# Altium PCB PCB3.PcbDoc (part 1 of 2)
Units mm, origin at the board's own origin, x right, y up, seen from the top; angles counter-clockwise.
Board outline 95 x 84.16 mm, 2 copper layers (Top Layer, Bottom Layer); 165 components, 99 nets, 457 pads, 1500 vias.
Unrouted connection lines stored in the file: 1.
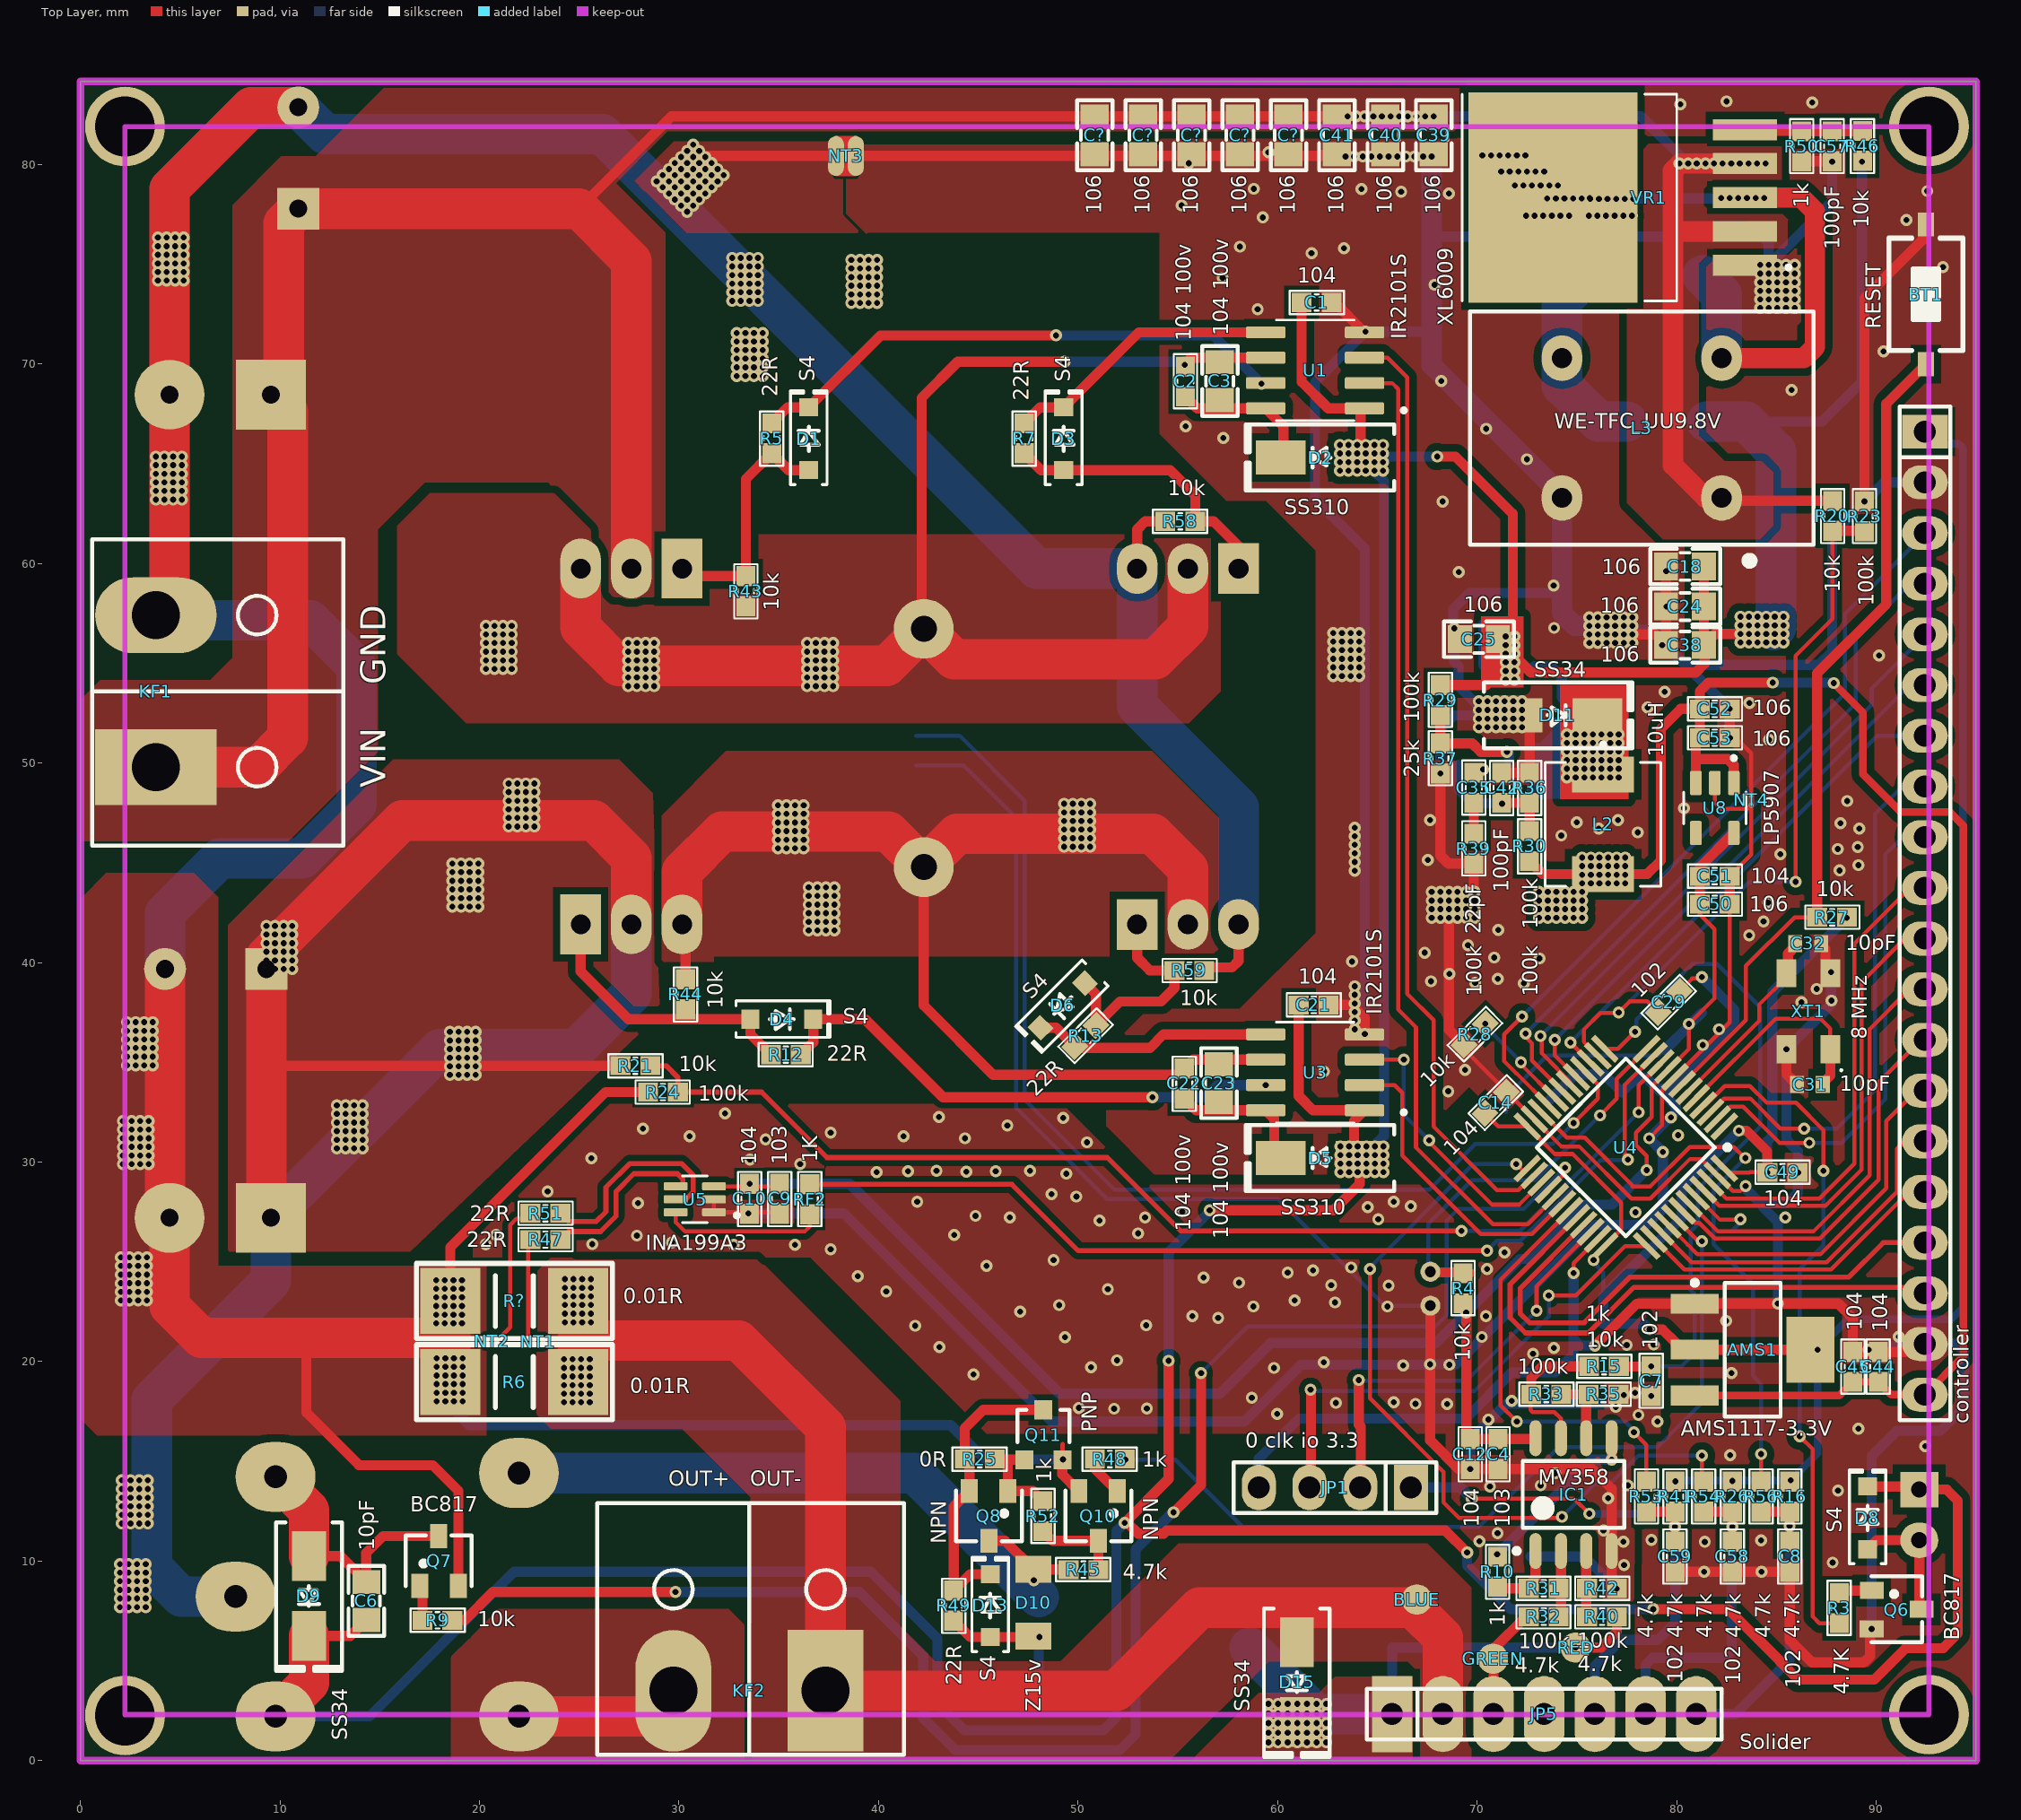
[diagram p0: Top Layer view]
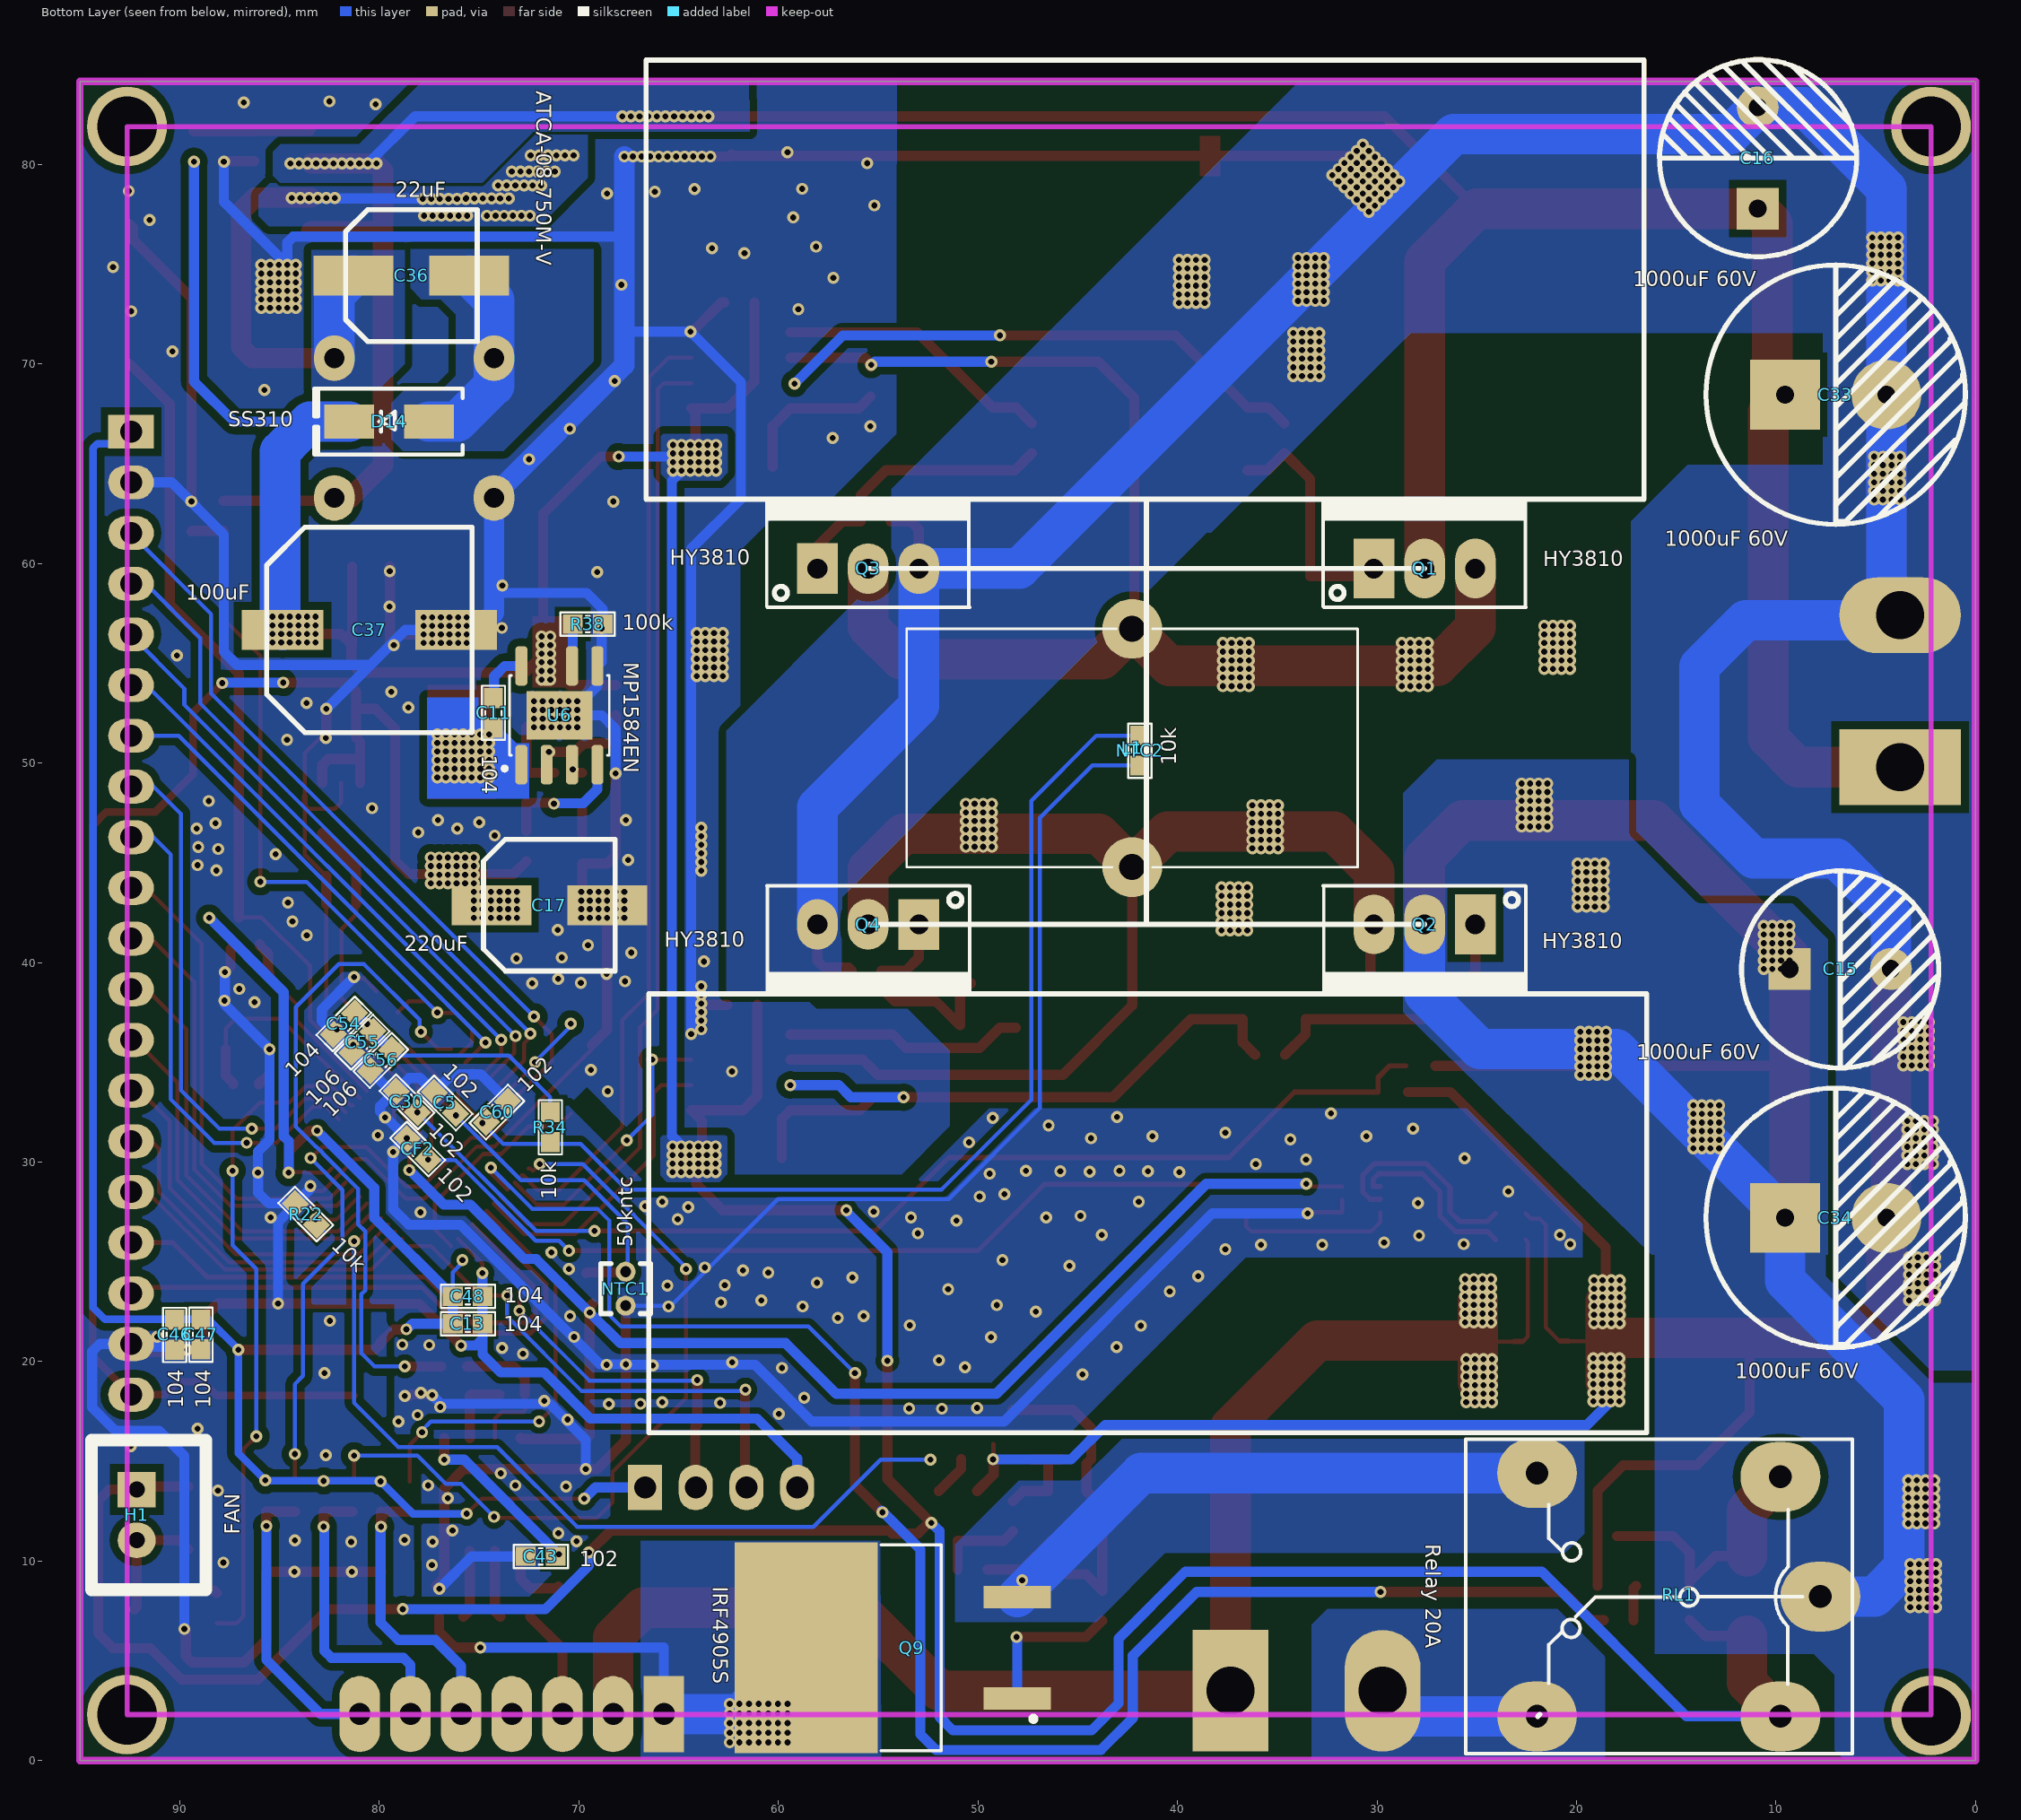
[diagram p1: Bottom Layer view, seen from below]
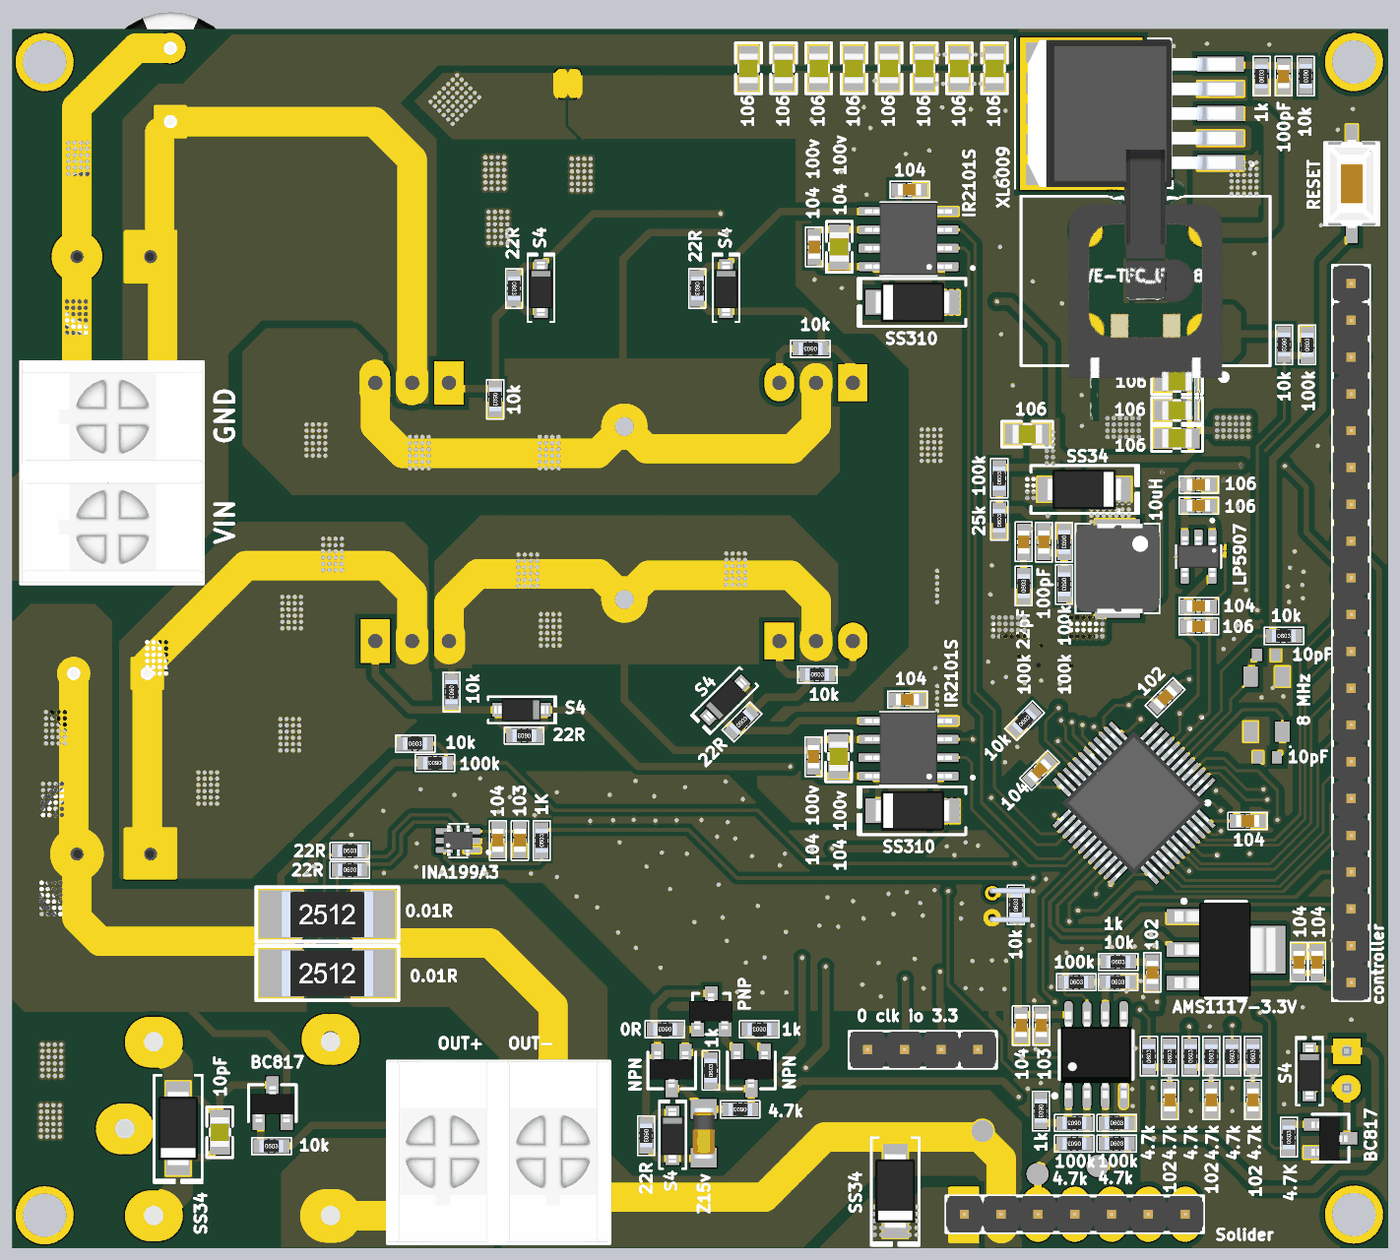
[diagram p3: 3D render of the assembled board from above, using the file's embedded part models]
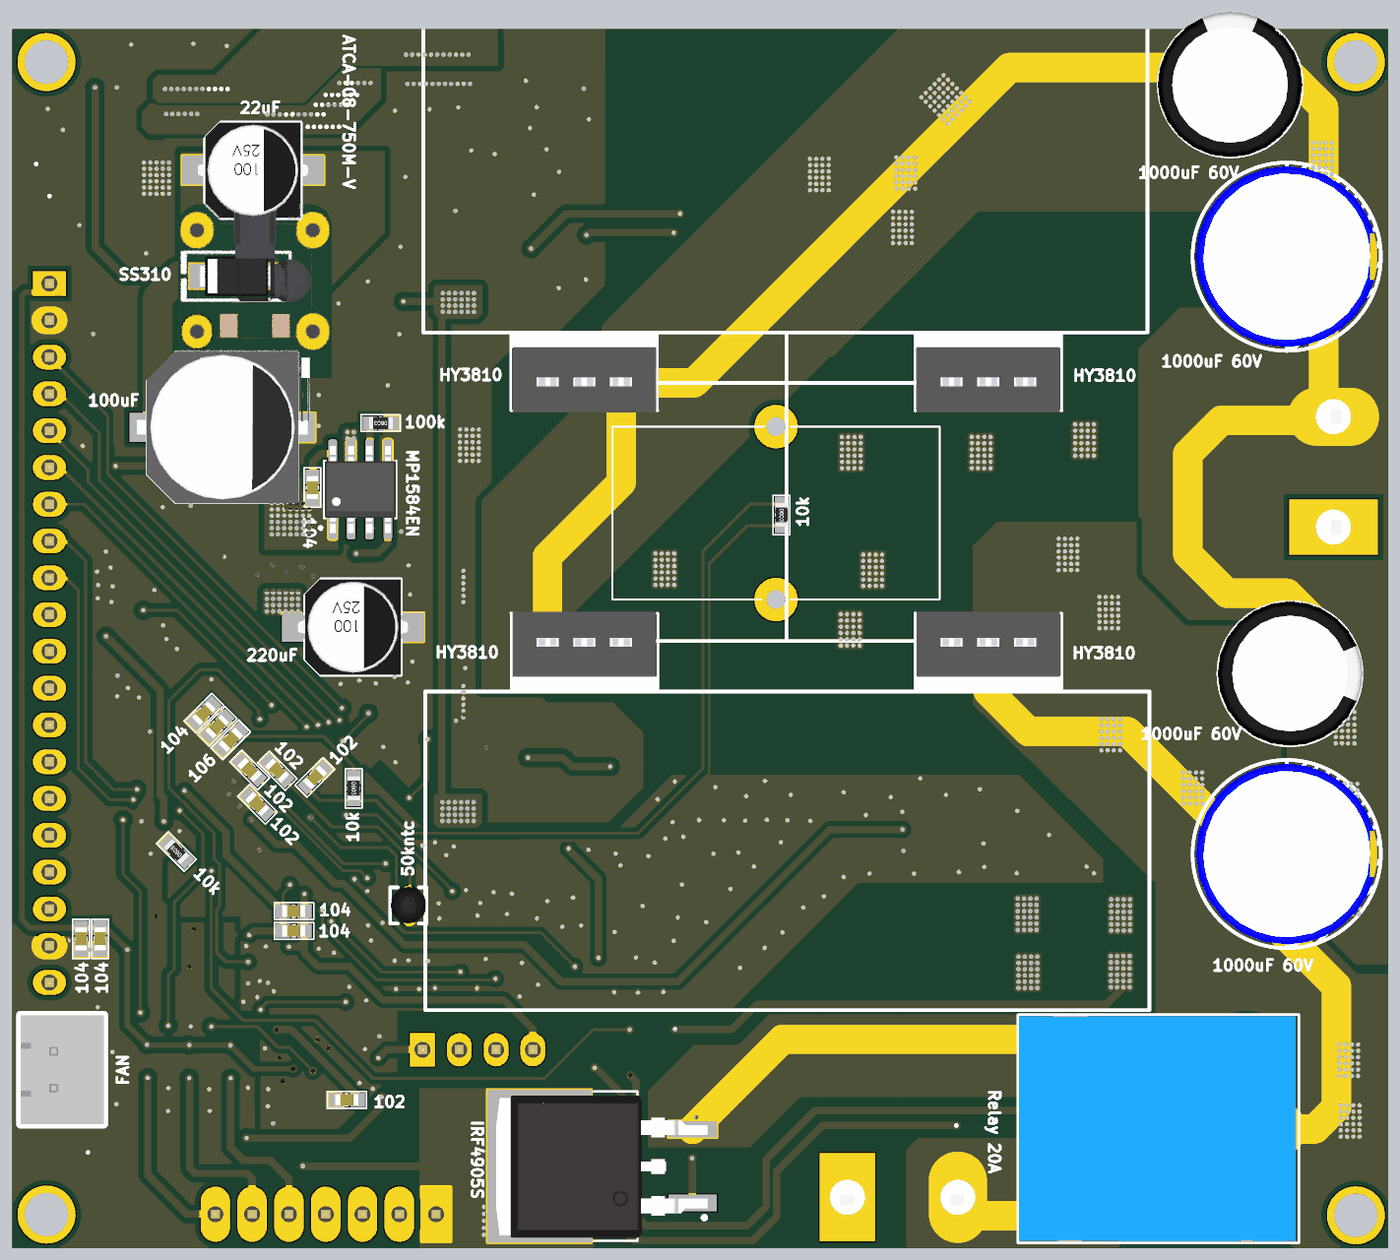
[diagram p4: 3D render of the assembled board from below, using the file's embedded part models]

## Layer stack, top to bottom
Top Solder: solder mask 0.0102, Solder Resist, Dk 3.5
Top Layer: signal copper 0.0356
Dielectric 1: dielectric 0.32, FR-4, Dk 4.8
Bottom Layer: signal copper 0.0356
Bottom Solder: solder mask 0.0102, Solder Resist, Dk 3.5

## Board outline
0,0 0,84.162 95,84.162 95,0

## Design rules (kind name [scope] priority, off if disabled: settings)
Clearance [All] p1: gap=0.203 ignorepadtopadclearanceinfootprint=FALSE
DiffPairsRouting [All] p1: maxlimit=0.254 minlimit=0.203 mostfreqgap=0.254 toplayer_minwidth=0.203 toplayer_maxwidth=0.33 toplayer_prefwidth=0.254 bottomlayer_minwidth=0.203 bottomlayer_maxwidth=0.33 bottomlayer_prefwidth=0.254 maxuncoupledlength=12.7
PolygonConnect [All] p1: connectstyle=Direct reliefconductorwidth=0.254 reliefentries=4 polygonreliefangle="90 Angle" airgapwidth=0.254
RoutingVias [All] p1: holewidth=0.3 width=0.6 viastyle="Through Hole" minholewidth=0.3 minwidth=0.6 maxholewidth=0.3 maxwidth=0.6
SolderMaskExpansion [All] p1: expansion=0.102 istentingtop=FALSE
Width [All] p1: maxlimit=1.016 minlimit=0.203 preferedwidth=0.508
29 further rules are at their usual default settings.

## Classes and differential pairs
differential pair SO: +SO_P -SO_N
differential pair USB: +USB_P -USB_N

## Components (designator, comment, footprint, x,y, rotation, side; value= is the part's Value field where it differs from the comment)
AMS1 "AMS1117-3.3V" SOT223 83.8,20.599 r270 top value="AMS1117-3.3V SOT223"
BLUE "TestPoin" TP-60 66.979,8.074 r90 top
BT1 "RESET" "Nut Nhan 2 Chan SMD 3x6x2.5" 92.481,73.482 r90 top
C1 "104" "tu 0603" 61.951,73.076 r0 top
C2 "104 100v" "tu 0603" 55.372,69.113 r90 top
C3 "104 100v" "tu 0805" 57.099,69.139 r270 top
C4 "103" "tu 0603" 71.044,15.367 r270 top
C5 "102" "tu 0603" 76.708,32.969 r225 bottom
C6 "10pF" "tu 0805" 14.326,8.001 r90 top
C7 "102" "tu 0603" 78.715,19.025 r90 top
C8 "102" "tu 0603" 85.659,10.223 r90 top
C9 "103" "tu 0603" 35.044,28.157 r270 top
C10 "104" "tu 0603" 33.536,28.157 r270 top
C11 "104" "tu 0603" 74.273,52.501 r90 bottom
C12 "104" "tu 0603" 69.647,15.367 r270 top
C13 "104" "tu 0603" 75.565,21.895 r180 bottom
C14 "104" "tu 0603" 70.92,32.972 r45 top
C15 "1000uF 60V" "tu hoa 10mm" 6.782,39.675 r180 bottom
C16 "1000uF 60V" "tu hoa 10mm" 10.922,80.315 r90 bottom
C17 "220uF" "tu nhom 6.3 (d)" 71.476,42.875 r180 bottom
C18 "106" "tu 0805" 80.416,59.842 r180 top
C21 "104" "tu 0603" 61.798,37.871 r0 top
C22 "104 100v" "tu 0603" 55.321,33.934 r270 top
C23 "104 100v" "tu 0805" 57.052,33.954 r270 top
C24 "106" "tu 0805" 80.416,57.836 r180 top
C25 "106" "tu 0805" 70.082,56.196 r180 top
C29 "102" "tu 0603" 79.601,38.021 r225 top
C30 "102" "tu 0603" 78.616,33.023 r225 bottom
C31 "10pF" CAPC1608X09L 86.665,33.884 r0 top
C32 "10pF" CAPC1608X09L 86.589,40.945 r180 top
C33 "1000uF 60V" "tu hoa 13mm" 7.01,68.453 r180 bottom
C34 "1000uF 60V" "tu hoa 13mm" 7.01,27.203 r180 bottom
C35 "22pF" "tu 0603" 69.828,48.753 r90 top
C36 "22uF" "tu nhom 6.3 (D)" 78.384,74.422 r180 bottom
C37 "100uF" "tu nhom 10 (g)" 80.493,56.667 r180 bottom
C38 "106" "tu 0805" 80.416,55.905 r180 top
C39 "106" "tu 0805" 67.818,81.458 r270 top
C40 "106" "tu 0805" 65.391,81.458 r270 top
C41 "106" "tu 0805" 62.964,81.458 r270 top
C42 "100pF" "tu 0603" 71.225,48.753 r270 top
C43 "102" "tu 0603" 71.907,10.236 r180 bottom
C44 "104" "tu 0603" 90.094,19.736 r90 top
C45 "104" "tu 0603" 88.824,19.736 r90 top
C46 "104" "tu 0603" 90.247,21.347 r270 bottom
C47 "104" "tu 0603" 88.935,21.361 r270 bottom
C48 "104" "tu 0603" 75.565,23.266 r180 bottom
C49 "104" "tu 0603" 85.293,29.489 r0 top
C50 "106" "tu 0603" 81.902,42.926 r0 top
C51 "104" "tu 0603" 81.902,44.323 r0 top
C52 "106" "tu 0603" 81.902,52.705 r0 top
C53 "106" "tu 0603" 81.902,51.257 r0 top
C54 "104" "tu 0603" 81.763,36.932 r315 bottom
C55 "106" "tu 0603" 80.848,36.017 r315 bottom
C56 "106" "tu 0603" 79.908,35.103 r315 bottom
C57 "100pF" "tu 0603" 87.782,80.899 r90 top
C58 "102" "tu 0603" 82.786,10.223 r90 top
C59 "102" "tu 0603" 79.912,10.223 r90 top
C60 "102" "tu 0603" 74.092,32.512 r315 bottom
C? "106" "tu 0805" 60.537,81.458 r270 top
C? "106" "tu 0805" 58.11,81.458 r270 top
C? "106" "tu 0805" 50.829,81.458 r270 top
C? "106" "tu 0805" 55.683,81.458 r270 top
C? "106" "tu 0805" 53.256,81.458 r270 top
CF2 "102" "tu 0603" 78.08,30.658 r225 bottom
controller "JP 1x20 2.54" "JP 1x20 DT" 92.431,66.599 r270 top (schematic designator JP2)
D1 "S4" "DIODE SOD-123" 36.5,66.243 r90 top
D2 "SS310" "DIODE SMA" 62.154,65.303 r180 top
D3 "S4" "DIODE SOD-123" 49.276,66.243 r90 top
D4 "S4" "DIODE SOD-123" 35.154,37.16 r0 top
D5 "SS310" "DIODE SMA" 62.154,30.201 r180 top
D6 "S4" "DIODE SOD-123" 49.225,37.846 r225 top
D8 "S4" "DIODE SOD-123" 89.56,12.167 r90 top
D9 "SS34" "DIODE SMA" 11.455,8.255 r270 top
D10 "Z15v" "DIODE ZENNER SMD SOD80" 47.752,7.925 r270 top
D11 "SS34" "DIODE SMA" 74.019,52.386 r0 top
D13 "S4" "DIODE SOD-123" 45.593,7.772 r90 top
D14 "SS310" "DIODE SMA" 79.502,67.107 r0 bottom
D15 "SS34" "DIODE SMA" 60.96,3.937 r270 top
GREEN "TestPoin" TP-60 70.79,5.105 r90 top
H1 "FAN" XH2.54M-2 92.151,13.589 r270 bottom
IC1 "MV358" "SOP 8" 74.828,13.335 r90 top
JP1 "0 clk io 3.3" "JP 1x4 DT" 66.675,13.691 r180 top
JP5 "Solider" "JP 1x7 DT" 65.735,2.337 r0 top
KF1 "VIN    GND" "CON 2 KF7.62" 3.785,49.835 r90 top
KF2 "OUT+   OUT-" "CON 2 KF7.62" 37.287,3.505 r180 top
L1 "ATCA-08-750M-V" IND_ATCA-08-750M-V 42.266,50.749 r270 bottom locked
L2 "10uH" "CUON CAM SMD 0530" 76.305,46.925 r270 top
L3 "WE-TFC_UU9.8V" WE-TFC_UU9.8V 78.244,66.782 r180 top locked
NT1 "0.25mm" NetTie_0.25mm 23.186,21.004 r180 top net-tie
NT2 "0.25mm" NetTie_0.25mm 20.357,21.029 r0 top net-tie
NT3 "NetTie_2mm" NetTie_2mm 37.862,80.416 r0 top net-tie
NT4 "0.25mm" NetTie_0.25mm 83.73,48.387 r270 top net-tie
NTC1 "50kntc" MF52 67.691,23.673 r90 bottom locked
NTC2 "10k" "tro smd 0603" 41.885,50.622 r270 bottom
Q1 "HY3810" TO220#1 30.15,59.741 r180 bottom locked
Q2 "HY3810" TO220#1 25.07,41.91 r0 bottom locked
Q3 "HY3810" TO220#2 58.039,59.741 r180 bottom
Q4 "HY3810" TO220#2 52.959,41.91 r0 bottom
Q6 "BC817" SOT-23 91.014,7.589 r270 top value=C9014
Q7 "BC817" SOT-23 17.958,10.008 r0 top value=C9014
Q8 "NPN" SOT-23 45.537,12.263 r180 top value=C9014
Q9 "IRF4905S" D2PACK 54.153,6.198 r0 bottom
Q10 "NPN" SOT-23 51.023,12.263 r180 top value=C9014
Q11 "PNP" SOT23 48.26,16.332 r0 top
R3 "4.7K" "Tro smd 0603" 88.138,7.645 r90 top
R4 "10k" "tro smd 0603" 69.291,23.673 r90 top
R5 "22R" "Tro smd 0603" 34.646,66.269 r270 top
R6 "0.01R" "tro smd 2512" 21.742,18.974 r0 top
R7 "22R" "Tro smd 0603" 47.295,66.269 r270 top
R9 "10k" "Tro smd 0603" 17.894,7.036 r0 top
R10 "1k" "Tro smd 0603" 71.018,9.474 r270 top
R12 "22R" "Tro smd 0603" 35.357,35.382 r180 top
R13 "22R" "Tro smd 0603" 50.368,36.322 r45 top
R15 "1k" "Tro smd 0603" 76.352,19.761 r0 top
R16 "4.7k" "Tro smd 0603" 85.659,13.233 r90 top
R20 "10k" "tro smd 0603" 87.808,62.382 r270 top
R21 "10k" "tro smd 0603" 27.813,34.823 r0 top
R22 "10k" "Tro smd 0603" 83.668,27.381 r45 bottom
R23 "100k" "tro smd 0603" 89.408,62.357 r90 top
R24 "100k" "tro smd 0603" 29.198,33.503 r180 top
R25 "0R" "Tro smd 0603" 45.072,15.113 r180 top
R26 "4.7k" "Tro smd 0603" 82.786,13.233 r90 top
R27 "10k" "Tro smd 0603" 87.782,42.266 r0 top
R28 "10k" "Tro smd 0603" 69.875,36.398 r45 top
R29 "100k" "Tro smd 0603" 68.151,53.148 r90 top
R30 "100k" "Tro smd 0603" 72.622,45.832 r270 top
R31 "100k" "Tro smd 0603" 73.33,8.636 r180 top
R32 "4.7k" "Tro smd 0603" 73.33,7.214 r180 top
R33 "100k" "Tro smd 0603" 73.457,18.364 r0 top
R34 "10k" "Tro smd 0603" 71.425,31.75 r270 bottom
R35 "10k" "Tro smd 0603" 76.327,18.364 r0 top
R36 "100k" "Tro smd 0603" 72.622,48.753 r270 top
R37 "25k" "Tro smd 0603" 68.151,50.227 r90 top
R38 "100k" "Tro smd 0603" 69.548,56.958 r0 bottom
R39 "100k" "Tro smd 0603" 69.828,45.705 r90 top
R40 "4.7k" "Tro smd 0603" 76.251,7.214 r0 top
R41 "4.7k" "Tro smd 0603" 79.912,13.233 r90 top
R42 "100k" "Tro smd 0603" 76.251,8.636 r0 top
R43 "10k" "tro smd 0603" 33.35,58.61 r270 top
R44 "10k" "tro smd 0603" 30.328,38.405 r270 top
R45 "4.7k" "tro smd 0603" 50.267,9.576 r180 top
R46 "10k" "tro smd 0603" 89.306,80.924 r270 top
R47 "22R" "tro smd 0603" 23.305,26.111 r0 top
R48 "1k" "tro smd 0603" 51.587,15.113 r180 top
R49 "22R" "tro smd 0603" 43.764,7.772 r270 top
R50 "1k" "tro smd 0603" 86.258,80.899 r90 top
R51 "22R" "tro smd 0603" 23.305,27.432 r0 top
R52 "1k" "tro smd 0603" 48.235,12.255 r90 top
R53 "4.7k" "tro smd 0603" 78.476,13.233 r90 top
R54 "4.7k" "tro smd 0603" 81.349,13.233 r90 top
R56 "4.7k" "Tro smd 0603" 84.222,13.233 r90 top
R58 "10k" "tro smd 0603" 55.118,62.103 r180 top
R59 "10k" "tro smd 0603" 55.575,39.599 r0 top
R? "0.01R" "tro smd 2512" 21.742,23.038 r0 top
RED "TestPoin" TP-60 74.93,5.664 r90 top
RF2 "1K" "Tro smd 0603" 36.551,28.131 r90 top
RL1 "Relay 20A" "Relay 5 Chan SRD" 7.779,8.224 r0 bottom
U1 "IR2101S" SOIC127P600X175-8N 61.874,69.672 r180 top
U3 "IR2101S" SOIC127P600X175-8N 61.874,34.493 r180 top
U4 "STM32F103C8T6" LQFP-48_19.6_393_58X11_SMD 77.445,30.734 r225 top locked
U5 "INA199A3" SOT65P210X110-6N 30.793,28.131 r180 top
U6 "MP1584EN" SOIC127P600X170-9N 70.971,52.386 r90 bottom
U8 "LP5907" SOT95P280X145-5N 81.905,47.742 r270 top
VR1 "XL6009" DPAK170P1435X465-6N 77.292,78.334 r180 top
XT1 "8 MHz" DFN220P320X110-4N 86.594,37.554 r90 top

## Footprints (in the part's own frame and the unit in brackets; to place one, negate y for a bottom-side part, rotate by r counter-clockwise, add the part's x,y. Pads: shape width x height; smd on the part's side, far side on the other; paste and mask are expansions set on the pad)
CAPC1608X09L [mm]
  rect 0.7x0.85 smd: 1(-0.65,0) 2(0.65,0)
  body extent -0.85,-0.45 0.85,0.45, height 0.9
"CON 2 KF7.62" [mil]
  rect 150x240 hole 95: 1(-2,0)
  oval 150x240 hole 95: 2(298,0)
  silkscreen extent -157,-370 448,126, body extent -152,-370 448,122, height 493
"CUON CAM SMD 0530" [mm] "CUON CAM SMD 0530"
  rect 1.8x3.1 smd: 1(-2.5,0) 2(2.5,0)
  silkscreen extent -4.1,-2.9 3.1,2.9, body extent -3.1,-2.88 3.1,2.92, height 3
D2PACK [mil]
  rect 132.23x44.65 smd: 1(-241.08,121.35) 3(-241.08,-78.65)
  rect 282.7x416 smd: 2(175.12,21.35)
  silkscreen extent -278,-182 28,224, body extent -282,-171 293,216, height 166
DFN220P320X110-4N [mm]
  rect 1.4x1 smd: 1(-1.9,-1.1) 3(1.9,1.1) G(-1.9,1.1) G(1.9,-1.1)
  silkscreen extent -3,-1.7 -2.9,-1.6, body extent -2.55,-1.65 2.55,1.65, height 1.1
"DIODE SMA" [mm] "SMA"
  rect 2.5x1.7 smd: 1(-2,0) 2(2,0)
  silkscreen extent -3.68,-1.65 3.75,1.65, body extent -2.6,-1.37 2.6,1.37, height 2.4
"DIODE SOD-123" [mm] "SOD-123"
  rect 0.9x0.95 smd: 1(-1.575,0) 2(1.575,0)
  silkscreen extent -2.3,-0.92 2.41,0.92, body extent -1.86,-0.78 1.86,0.77, height 1.35
"DIODE ZENNER SMD SOD80" [mm] "SOD80"
  rect 1.35x1.8 smd: 1(1.675,0) 2(-1.675,0)
  body extent -1.75,-0.76 1.75,0.74, height 1.45
DPAK170P1435X465-6N [mm]
  rect 3.21x1.05 smd: 1(-6.13,3.4) 2(-6.13,1.7) 3(-6.13,0) 4(-6.13,-1.7) 5(-6.13,-3.4)
  rect 8.46x10.53 smd paste-6: 6(3.5,0)
  silkscreen extent -8.4,-5.18 8.05,5.18, body extent -7.17,-5.08 7.17,5.08, height 4.65
IND_ATCA-08-750M-V [mm]
  round 3 hole 1.3: 1(-5.969,0) 2(5.969,0)
  silkscreen extent -5.97,-11.3 5.97,11.3
"JP 1x4 DT" [mil] "4 pins, 1 row, straight, gold plating"
  rect 67x90 hole 43.31: 1(0,0)
  oval 67x90 hole 43.31: 2(100,0) 3(200,0) 4(300,0)
  silkscreen extent -50,-50 350,50, body extent -50,-50 350,50, height 336
"JP 1x7 DT" [mm] "7 pins, 1 row, straight, gold plating"
  rect 2.032x3.81 hole 1.1: 1(0,0)
  oval 2.032x3.81 hole 1.1: 2(2.54,0) 3(5.08,0) 4(7.62,0) 5(10.16,0) 6(12.7,0) 7(15.24,0)
  silkscreen extent -1.27,-1.27 16.51,1.27, body extent -1.27,-1.27 16.51,1.27, height 8.54
"JP 1x20 DT" [mil] "20 pins, 1 row, straight, gold plating"
  rect 67x90 hole 43.31: 1(0,0)
  oval 67x90 hole 43.31: 2(100,0) 3(200,0) 4(300,0) 5(400,0) 6(500,0) 7(600,0) 8(700,0) 9(800,0) 10(900,0) 11(1000,0) 12(1100,0) 13(1200,0) 14(1300,0) 15(1400,0) 16(1500,0) 17(1600,0) 18(1700,0) 19(1800,0) 20(1900,0)
  silkscreen extent -50,-50 1950,50, body extent -50,-50 1950,50, height 336
LQFP-48_19.6_393_58X11_SMD [mm] "48LQFP"
  rect 1.7x0.3 smd mask+0.076: 1(-4.238,2.75) 2(-4.238,2.25) 3(-4.238,1.75) 4(-4.238,1.25) 5(-4.238,0.75) 6(-4.238,0.25) 7(-4.238,-0.25) 8(-4.238,-0.75) 9(-4.238,-1.25) 10(-4.238,-1.75) 11(-4.238,-2.25) 12(-4.238,-2.75) 25(4.238,-2.75) 26(4.238,-2.25) 27(4.238,-1.75) 28(4.238,-1.25) 29(4.238,-0.75) 30(4.238,-0.25) 31(4.238,0.25) 32(4.238,0.75) 33(4.238,1.25) 34(4.238,1.75) 35(4.238,2.25) 36(4.238,2.75)
  rect 0.3x1.7 smd mask+0.076: 13(-2.75,-4.238) 14(-2.25,-4.238) 15(-1.75,-4.238) 16(-1.25,-4.238) 17(-0.75,-4.238) 18(-0.25,-4.238) 19(0.25,-4.238) 20(0.75,-4.238) 21(1.25,-4.238) 22(1.75,-4.238) 23(2.25,-4.238) 24(2.75,-4.238) 37(2.75,4.238) 38(2.25,4.238) 39(1.75,4.238) 40(1.25,4.238) 41(0.75,4.238) 42(0.25,4.238) 43(-0.25,4.238) 44(-0.75,4.238) 45(-1.25,4.238) 46(-1.75,4.238) 47(-2.25,4.238) 48(-2.75,4.238)
  silkscreen extent -3.72,-3.15 3.15,3.72, body extent -4.5,-4.5 4.5,4.5, height 1.7
MF52 [mm]
  round 1 hole 0.55: 1(-0.869,-0.039) 2(0.831,-0.039)
  silkscreen extent -1.27,-1.29 1.23,1.21, body extent -1.24,-1.24 1.26,2.56, height 5.45
NetTie_0.25mm [mm]
  round 0.25 smd paste-2 mask+0.102: 1(0,0) 2(0.5,0)
  Top Layer region: 0,0.125 0.5,0.125 0.5,-0.125 0,-0.125
NetTie_2mm [mm]
  oval 0.8x2 smd paste-2 mask+0.102: 1(0,0) 2(1,0)
  Top Layer region: 0,1 1,1 1,-1 0,-1
"Nut Nhan 2 Chan SMD 3x6x2.5" [mm] "Switch SMD type"
  rect 1.2x0.8 smd: 1(-3.5,0) 2(3.5,0)
  silkscreen extent -2.82,-1.85 2.82,1.85, body extent -3.05,-1.85 3.05,1.85, height 2.5
"Relay 5 Chan SRD" [mm] "Relay SPDT, 5 pin, 10A,W 650mil, L 800mil, H 800mil"
  oval 4x3.5 hole 1.143: 1(0,0) 2(14.2,6) 3(14.2,-6.192) 4(2,-6) 5(2,6)
  silkscreen extent -1.61,-7.89 17.78,7.87, body extent -1.4,-7.77 17.7,7.73, height 15.3
SOIC127P600X170-9N [mm]
  rrect54% 1.97x0.6 smd paste+0 mask+0.102: 1(-2.475,1.905) 2(-2.475,0.635) 3(-2.475,-0.635) 4(-2.475,-1.905) 5(2.475,-1.905) 6(2.475,-0.635) 7(2.475,0.635) 8(2.475,1.905)
  rect 2.41x3.3 smd paste-3 mask+0.102: 9(0,0)
  silkscreen extent -2.77,-2.5 2,2.84, body extent -3,-2.45 3,2.45, height 1.7
SOIC127P600X175-8N [mm]
  rrect25% 1.97x0.6 smd: 1(-2.475,1.905) 2(-2.475,0.635) 3(-2.475,-0.635) 4(-2.475,-1.905) 5(2.475,-1.905) 6(2.475,-0.635) 7(2.475,0.635) 8(2.475,1.905)
  silkscreen extent -4.54,-2.53 1.95,2.53, body extent -3,-2.5 3,2.5, height 1.75
"SOP 8" [mm] "SOIC, 8-Leads, Body 4.9x3.9mm, Pitch 1.27mm, IPC High Density"
  oval 1.8x0.6 smd: 1(-2.825,1.905) 2(-2.825,0.635) 3(-2.825,-0.635) 4(-2.825,-1.905) 5(2.825,-1.905) 6(2.825,-0.635) 7(2.825,0.635) 8(2.825,1.905)
  silkscreen extent -2.95,-2.55 1.67,2.98, body extent -2.99,-2.45 3,2.45, height 1.6
SOT23 [mm] "SOT23"
  rect 0.9x0.95 smd: 1(-0.95,-1.25) 2(0,1.25)
  rect 0.9x0.95 smd mask+0: 3(0.95,-1.25)
  silkscreen extent -1.3,-0.38 1.3,1.25, body extent -1.52,-1.23 1.48,1.27, height 1.06
SOT65P210X110-6N [mm]
  rrect25% 1.19x0.4 smd: 1(-0.96,0.65) 2(-0.96,0) 3(-0.96,-0.65) 4(0.96,-0.65) 5(0.96,0) 6(0.96,0.65)
  silkscreen extent -2.2,-1.17 0.63,1.17, body extent -1.05,-1 1.05,1, height 1.1
SOT95P280X145-5N [mm]
  rrect25% 1.21x0.58 smd paste+0 mask+0.102: 1(-1.255,0.95) 2(-1.255,0) 3(-1.255,-0.95) 4(1.255,-0.95) 5(1.255,0.95)
  silkscreen extent -2.6,-1.56 0.8,1.56, body extent -1.4,-1.45 1.4,1.45, height 1.45
SOT223 [mm]
  rect 1x2.4 smd: 1(-2.3,-2.9) 2(0,-2.9) 3(2.3,-2.9)
  rect 3.3x2.4 smd: 4(0,2.9)
  silkscreen extent -3.47,-3.02 3.35,1.4, body extent -3.25,-3.56 3.25,3.4, height 1.68
SOT-23 [mm] "SOT 23 _ 1-3-2"
  rect 0.85x1.2 smd: 1(-0.94,-1.245) 2(0.985,-1.25) 3(0.005,1.25)
  silkscreen extent -1.65,-1.27 1.65,1.27, body extent -1.47,-1.33 1.53,1.17, height 1.06
TO220#1 [mil] "TO-220"
  rect 80x118.11 hole 39: 1(0,0)
  oval 80x118.11 hole 39: 2(100,0) 3(200,0)
  silkscreen extent -100,-76 300,130, body extent -95,-80 295,97, height 323
TO220#2 [mil] "TO-220"
  rect 80x100 hole 39: 1(0,0)
  oval 80x100 hole 39: 2(100,0) 3(200,0)
  silkscreen extent -100,-76 300,130, body extent -95,-80 295,97, height 323
TP-60 [mil]
  round 60 smd: 1(0.11,-0.02)
"tro smd 0603" [mm] "Chip Capacitor, 2-Leads, Body 1,60x0,80mm, IPC Medium Density"
  rect 1x0.95 smd mask+0.076: 1(-0.75,0) 2(0.75,0)
  silkscreen extent -1.35,-0.58 1.37,0.58, body extent -0.82,-0.42 0.82,0.43, height 0.44
"Tro smd 0603" [mm] "Chip Capacitor, 2-Leads, Body 1,60x0,80mm, IPC Medium Density"
  rect 1x0.95 smd mask+0.076: 1(-0.75,0) 2(0.75,0)
  silkscreen extent -1.35,-0.58 1.37,0.58, body extent -0.82,-0.42 0.82,0.43, height 0.44
"tro smd 2512" [mm]
  rect 3x3.3 smd: 1(-3.2,0) 2(3.2,0)
  silkscreen extent -4.9,-1.88 4.93,1.88, body extent -3.12,-1.57 3.18,1.58, height 0.82
"tu 0603" [mm] "Chip Capacitor, 2-Leads, Body 1,60x0,80mm, IPC Medium Density"
  rect 1x0.95 smd mask+0.076: 1(-0.75,0) 2(0.75,0)
  silkscreen extent -1.35,-0.58 1.37,0.58, body extent -0.8,-0.4 0.8,0.4, height 0.9
"tu 0805" [mm] "Compoment SMD 80x50mil"
  rect 1.2x1.4 smd: 1(-0.946,-0.003) 2(0.954,-0.003)
  silkscreen extent -1.75,-0.89 1.75,0.89, body extent -1.01,-0.64 1.01,0.63, height 0.61
"tu hoa 10mm" [mm]
  rect 2.1x2.1 hole 0.9: 1(-2.54,0)
  round 2.1 hole 0.9: 2(2.54,0)
  silkscreen extent -4.95,-4.96 4.93,4.92, body extent -5,-5 5.01,5, height 20.01
"tu hoa 13mm" [mm]
  rect 3.5x3.5 hole 0.9: 1(-2.54,0)
  round 3.5 hole 0.9: 2(2.54,0)
  silkscreen extent -6.5,-6.5 6.5,6.5, body extent -6.25,-6.25 6.26,6.25, height 23.02
"tu nhom 6.3 (d)" [mm]
  rect 4x2 smd: 1(-2.9,0) 2(2.9,0)
  silkscreen extent -3.3,-3.3 3.3,3.3, body extent -3.8,-3.3 3.8,3.3, height 8
"tu nhom 6.3 (D)" [mm]
  rect 4x2 smd: 1(-2.9,0) 2(2.9,0)
  silkscreen extent -3.3,-3.3 3.3,3.3, body extent -3.8,-3.3 3.8,3.3, height 8
"tu nhom 10 (g)" [mm]
  rect 4.1x2 smd: 1(-4.35,0) 2(4.35,0)
  silkscreen extent -5.15,-5.15 5.15,5.15, body extent -5.9,-5.25 5.9,5.25, height 10.5
WE-TFC_UU9.8V [mm]
  oval 2.032x2.286 hole 1: 1(-4,3.5) 2(4,3.5) 3(4,-3.5) 4(-4,-3.5)
  silkscreen extent -8.6,-5.85 8.6,6.85, body extent -5.3,-9.05 5.3,9.7, height 7.85
XH2.54M-2 [mm]
  rect 1.778x1.905 hole 0.8: 1(0,0)
  oval 1.778x1.905 hole 0.8: 2(2.54,0)
  silkscreen extent -2.48,-2.26 5.02,3.46, body extent -2.48,-2.26 5.02,3.48, height 6.91

## Part data
AMS1: library part "AMS1117 SMD", "Dán", Chung_Loai=Dán, Don_Vi=Con, Ma_Hang=MH000596
BT1: library part "Nut Nhan 2 Chan SMD 3x6x2.5", "Nut Nhan 2 Chan SMD 3x6x2.5", Ma_Hang=MH001036, Ten="Nút Nhấn 2 Chân 3x6x2.5MM SMD"
C1 C2 C13 C14 C21 C22 C44 C45 C46 C47 C48 C49: library part "Tu 0603 101 50V 10%", "Dán", Chung_Loai=Dán, Don_Vi=Con, Ma_Hang=MH004565, So_Chan=2, Ten_Linh_Kien="Tụ 0603 101-0.1nF 10% 50V"
C3 C6 C23: library part "Tu 0805 101 50V 20%", "Dán", Chung_Loai=Dán, Don_Vi=Con, Ma_Hang=MH002806, So_Chan=2, Ten_Linh_Kien="Tụ 0805 101-0.1nF 50V 20%"
C4 C7 C8 C9 C10 C12 C35 C42 C43 C50 C51 C52 C53 C54 C55 C56 C57 C58 C59 CF2: library part "Tu 0603 106 16V 20%", "Dán", Chung_Loai=Dán, Don_Vi=Con, Ma_Hang=MH004848, So_Chan=2, Ten_Linh_Kien="Tụ 0603-10uF 20% 16V"
C5 C11 C29 C30 C60: library part "Tu 0603 104 50V 10%", "Dán", Chung_Loai=Dán, Don_Vi=Con, Ma_Hang=MH004568, So_Chan=2, Ten_Linh_Kien="Tụ 0603 104-100nF 10% 50V"
C15 C16: library part "Tu Hoa 1000uF 10V 10x12", "Cắm", Chung_Loai=Cắm, Don_Vi=Con, Ma_Hang=MH006614, So_Chan=2, Ten_Linh_Kien="Tụ Hóa 1000uF 10V 10x12MM"
C17: library part "Tu Nhom 220uF 16V", "Dán", Chung_Loai=Dán, Don_Vi=Con, Ma_Hang=MH002227, So_Chan=2, Ten_Linh_Kien="Tụ Nhôm 220uF 16V 6.3x7.7MM"
C18 C24 C25 C38 C39 C40 C41 C? C? C? C? C?: library part "Tu 0805 106 16V 10%", "Dán", Chung_Loai=Dán, Don_Vi=Con, Ma_Hang=MH004553, So_Chan=2, Ten_Linh_Kien="Tụ 0805 106-10uF 10% 16V"
C31 C32: library part GRM188R71H104KA93D, "CAP CER 0.1UF 50V X7R 0603", Capacitance=0.1uF, Manufacturer="Murata Electronics North America", Operating Temperature="-55°C ~ 125°C", Package / Case="0603 (1608 Metric)", Ratings=-, Supplier Part Number 1=490-1519-2-ND, Temperature Coefficient=X7R, Tolerance=±10%, Voltage - Rated=50V, Applications="General Purpose", Category=Capacitors, ComponentLink1Description=http://www.murata.com/~/media/webrenewal/support/library/catalog/products/capacitor/mlcc/c02e.ashx?la=en-us, ComponentLink1URL=http://www.murata.com/~/media/webrenewal/support/library/catalog/products/capacitor/mlcc/c02e.ashx?la=en-us, Features=-, Height - Seated (Max)=-, Lead Spacing=-, Lead Style=-, Manufacturer Part Number=GRM188R71H104KA93D, Mounting Type="Surface Mount, MLCC", Packaging="Tape & Reel (TR)", Part Status=Active, Pricing 1="4000=0.01822, 8000=0.01663, 12000=0.01584 (USD)", Pricing 2="1=0.12, 10=0.084, 100=0.0396, 500=0.02778, 1000=0.023 (USD)", RoHS="RoHS Compliant", Size / Dimension="0.063\" L x 0.032\" W (1.60mm x 0.80mm)", Stock=19812000, Supplier 1=Digi-Key, Supplier 2=Digi-Key, Supplier Part Number 2=490-1519-1-ND, Thickness (Max)="0.035\" (0.90mm)"
C33 C34: library part "Tu Hoa 1000uF 50V 13x26", "Cắm", Chung_Loai=Cắm, Don_Vi=Con, Ma_Hang=MH006619, So_Chan=2, Ten_Linh_Kien="Tụ Hóa 1000uF 50V"
C36: library part "Tu Nhom 22uF 25V", "Dán", Chung_Loai=Dán, Don_Vi=Con, Ma_Hang=MH007613, So_Chan=2, Ten_Linh_Kien="Tụ Nhôm 22uF 25V"
C37: library part "Tu Nhom 100uF 35V", "Dán", Chung_Loai=Dán, Don_Vi=Con, Ma_Hang=MH004019, So_Chan=2, Ten_Linh_Kien="Tụ Nhôm 100uF 35V"
controller: library part "JP 1x20 2.54 Duc Thang", "Cắm", Chung_Loai=Cắm, Don_Vi=Con, Ma_Hang=MH000903, Ten_Linh_Kien="Jump Đơn Đực 2.54MM 1x40P Thẳng 11MM"
D1 D3 D4 D6 D8 D13: library part "Diode S4", "Dán", Chung_Loai=Dán, Don_Vi=Con, Ma_Hang=MH005519, Ten_Linh_Kien="Diode S4 SOD123 ( 1N5819 SOD123)"
D2 D5 D9 D11 D14 D15: library part "Diode SS34 ( 1N5822 )", "Dán", Chung_Loai=Dán, Don_Vi=Con, Ma_Hang=MH002104, Ten_Linh_Kien="Diode SS34 3A 40V SMA ( 1N5822 SS34A)"
D10: library part "Diode Zener 9.1V", "Dán", Chung_Loai=Dán, Don_Vi=Con, Ma_Hang=MH002882, Ten_Linh_Kien="Diode Zener 1/2W 9.1V SMD1206 ZMM9.1"
H1: library part "Header 2P 2.54 Duc Thang", "Cắm", Chung_Loai=Cắm, Don_Vi=Con, Ma_Hang=MH001283, Ten_Linh_Kien="Header 2P XH2.54-2P Đực Thẳng"
IC1: library part "LM358 SOP8", "Dán", Chung_Loai=Dán, Don_Vi=Con, Ma_Hang=MH000609, Ten_Linh_Kien="LM358 SOP8"
JP1: library part "JP 1x4 2.54 Duc Thang", "Cắm", Chung_Loai=Cắm, Don_Vi=Con, Ma_Hang=MH000903, Ten_Linh_Kien="Jump Đơn Đực 2.54MM 1x40P Thẳng 11MM"
JP5: library part "JP 1x7 2.54 Duc Thang", "Cắm", Chung_Loai=Cắm, Don_Vi=Con, Ma_Hang=MH000903, Ten_Linh_Kien="Jump Đơn Đực 2.54MM 1x40P Thẳng 11MM"
KF1 KF2: library part "CON 2 KF7.62", "Cắm", Chung_Loai=Cắm, Don_Vi=Con, Ma_Hang=MH002053, Ten_Linh_Kien="CON 2 KF7.62-2P 7.62MM (Đen Thẳng)"
L1: Package=None, Availability=Unavailable, MP=ATCA-08-750M-V, Price=None
L2: library part "Cuon Cam SMD 0530", "SMD 0530", Package=None, Availability=Unavailable, MP=FDV0530-H-1R5M=P3, Price=None
L3: "Size Typ UU; L = 25 mH; IR = 0.25 A; RDC = 3.6 â„", Package="Vertical-4 Wurth Electronics", Check_prices=https://www.snapeda.com/parts/744862250/Wurth+Electronics/view-part/?ref=eda, MF="Wurth Electronics", MP=744862250, SnapEDA_Link=https://www.snapeda.com/parts/744862250/Wurth+Electronics/view-part/?ref=snap
NT1 NT2 NT4: library part NetTie_0.25mm
NTC1: library part NCP15XH103F03RC, "THERMISTOR 10K OHM NTC 0402 SMD"
NTC2 R4 R20 R21 R23 R24 R34: library part "Tro 0603 5% 10k", "Dán", Chung_Loai=Dán, Don_Vi=Con, Ma_Hang=MH006316, So_Chan=2, Ten_Linh_Kien="Trở 0603 5% 10k"
Q1 Q2 Q3 Q4: library part "FET IRFZ44 DIP", "TO-220"
Q6: library part "Trans C1815 HF SMD", "SOT-23"
Q7 Q8 Q10: library part "Trans BC817", "SOT-23 - C8658"
Q9: "55V 75A"
Q11: library part "Trans A1015 BA SMD", "PNP 600mW, ECB"
R3 R5 R7 R9 R10 R12 R13 R15 R16 R22 R25 R26 R27 R28 R31 R32 R33 R35 R40 R41 R42 R45 R47 R48 R49 R51 R52 R53 R54 R56 RF2: library part "Tro 0603 5% 10R", "Dán", Chung_Loai=Dán, Don_Vi=Con, Ma_Hang=MH006317, So_Chan=2, Ten_Linh_Kien="Trở 0603 5% 10R"
R6 R?: library part "Tro 2512 1% 0.01R", "Dán", Chung_Loai=Dán, Don_Vi=Con, Ma_Hang=MH004912, So_Chan=2, Ten_Linh_Kien="Trở 2512 1% R010-0.01R 1W"
R29 R30 R36 R37 R38 R39 R43 R44 R46 R50 R58 R59: library part "Tro 0603 1% 0R", "Dán", Chung_Loai=Dán, Don_Vi=Con, Ma_Hang=MH005792, So_Chan=2, Ten_Linh_Kien="Trở 0603 1% 0R"
RL1: library part "Relay 5 Chan SRD", "Relay 5 Chan", Ma_Hang=MH009374, Ten="Relay 5V10A SRD-05VDC-SL-C Chính Hãng"
U1 U3: "Half-Bridge Gate Driver IC Non-Inverting 8-SOIC", Package="SOIC-8 Infineon", Check_prices=https://www.snapeda.com/parts/IR2101S/Infineon/view-part/?ref=eda, MF="Infineon Technologies", MP=IR2101S, SnapEDA_Link=https://www.snapeda.com/parts/IR2101S/Infineon/view-part/?ref=snap
U4: library part IC_STM32F103C8T6, "ARM® Cortex®-M3 STM32F1 Microcontroller IC 32-Bit 72MHz 64KB (64K x 8) FLASH 48-LQFP (7x7)", Alternate Part Number-1=NA, Case/Package=LQFP48, Manufacturer=STMicroelectronics, Manufacturer Part Number=STM32F103C8T6, Supplier Part Number-1=STM32F103C8T6, Supplier-1=LCSC
U5: library part INA199A3DCKR, "26V, bi-directional current sense amplifier", Package="SOT-SC70-6 Texas Instruments", Check_prices=https://www.snapeda.com/parts/INA199A3DCKR/Texas+Instruments/view-part/?ref=eda, MF="Texas Instruments", MP=INA199A3DCKR, SnapEDA_Link=https://www.snapeda.com/parts/INA199A3DCKR/Texas+Instruments/view-part/?ref=snap
U6: "Buck Switching Regulator IC Positive Adjustable 0.8V 1 Output 3A 8-SOIC (0.154, 3.90mm Width) Exposed Pad", Package="SOIC-8 Monolithic Power", Check_prices=https://www.snapeda.com/parts/MP1584EN/Monolithic+Power+Systems/view-part/?ref=eda, MF="Monolithic Power", MP=MP1584EN, SnapEDA_Link=https://www.snapeda.com/parts/MP1584EN/Monolithic+Power+Systems/view-part/?ref=snap
U8: library part LP5907MFX-2.85/NOPB, "250-mA, low-noise, high-PSRR, ultra-low-dropout voltage regulator with low IQ and enable", Package="SOT-23-5 Texas Instruments", Check_prices=https://www.snapeda.com/parts/LP5907MFX-2.85/NOPB/Texas+Instruments/view-part/?ref=eda, MF="Texas Instruments", MP=LP5907MFX-2.85/NOPB, SnapEDA_Link=https://www.snapeda.com/parts/LP5907MFX-2.85/NOPB/Texas+Instruments/view-part/?ref=snap
VR1: "The XL6009 regulator is a wide input range, current mode, DC/DC converter which is capable of generating either positive or negative output voltages.", Package="TO-263-5L XLSEMI", Availability="Not in stock", Check_prices=https://www.snapeda.com/parts/XL6009/XLSEMI/view-part/?ref=eda, MF=XLSEMI, MP=XL6009, Price=None, SnapEDA_Link=https://www.snapeda.com/parts/XL6009/XLSEMI/view-part/?ref=snap
XT1: library part ABM3B-8.000MHZ-10-1-U-T, "Crystal 8MHz ±10ppm 10pF 200 Ohm -10°C ~ 60°C Surface Mount 4-SMD, No Lead (DFN, LCC)", Frequency Stability=±10ppm, Load Capacitance=10pF, Manufacturer="Abracon LLC", Operating Mode=Fundamental, Operating Temperature="-10°C ~ 60°C", Package / Case="4-SMD, No Lead", Ratings=-, Supplier Part Number 1=535-9721-1-ND, Category="Crystals, Oscillators, Resonators", ComponentLink1Description=http://www.abracon.com/Resonators/abm3b.pdf, ComponentLink1URL=http://www.abracon.com/Resonators/abm3b.pdf, Frequency Tolerance=±10ppm, Height - Seated (Max)="0.043\" (1.10mm)", Manufacturer Part Number=ABM3B-8.000MHZ-10-1-U-T, Mounting Type="Surface Mount", Packaging="Cut Tape (CT)", Part Status=Active, Pricing 1="1=0.69, 10=0.578, 50=0.5198, 100=0.462, 500=0.4389 (USD)", Pricing 2="1000=0.336, 3000=0.315, 5000=0.3045, 10000=0.294 (USD)", RoHS="RoHS Compliant", Size / Dimension="0.197\" L x 0.126\" W (5.00mm x 3.20mm)", Stock=35437, Supplier 1=Digi-Key, Supplier 2=Digi-Key, Supplier Part Number 2=535-9721-2-ND, Type="MHz Crystal"

## Free pads (board coordinates)
  round 4 hole 3: 7(2.235,2.261) 7(2.235,81.89) 7(92.634,2.311) 7(92.634,81.89)

## Via types
v1: diameter 0.6, hole 0.3, Top Layer to Bottom Layer, tented both sides, 1500 vias

## Nets (pads, with @x,y where several pads share a name; then routed paths per layer and width w, separated by ;. In a path a pad name is that pad's centre, name@x,y a point inside that pad or via, vN(x,y) a via of type N, cw(c..) or ccw(c..) an arc to the next point about the centre after c; other vN are vias at no path point)
3v3: AMS1.2 AMS1.4 C13.1 C14.1 C46.1 C47.1 C48.1 C49.1 controller.1 JP1.1 R16.2 R26.2 R27.2 R41.2 U4.24 U4.36 U4.48 | length 137.1
  Top Layer w0.203: v1(69.723,13.132) 74.854,13.132 v1(75.611,12.375) ; C14.1@70.39,32.442 71.045,31.786 U4.24@72.503,31.786 72.506,31.786 73.889,30.404 74.778,30.404 77.216,27.965 77.216,26.616 U4.36@76.392,25.793 ; U4.48@82.386,29.682 82.588,29.48 83.642,29.48 83.652,29.489 C49.1@84.543,29.489
  Top Layer w0.508: v1(78.638,21.615) 78.656,21.598 79.291,21.598 79.954,20.935 79.954,20.845 80.2,20.599 v1(87.05,20.599) ; R41.2@79.912,13.983 79.922,13.983 v1(79.934,13.995) ; v1(83.109,31.572) 83.49,31.572 84.531,30.531 84.531,29.964 84.543,29.952 C49.1@84.543,29.489 84.543,29.476 v1(84.531,29.464)
  Bottom Layer w0.203: v1(75.826,25.086) 75.826,25.088 75.819,25.095 75.819,24.968 76.315,24.472 C48.1@76.315,23.266 ; v1@84.48,29.515 v1(84.531,29.464)
  Bottom Layer w0.381: v1(75.611,12.375) 78.313,12.375 v1(79.934,13.995) 79.959,14.021 v1(82.779,14.021) 85.674,14.021 v1(85.7,14.046) 87.05,15.397 v1(87.05,20.599) 88.562,22.111 90.856,22.111 93.739,22.111 94.343,22.715 94.343,65.779 94.12,66.002 93.383,66.002 controller.1@92.888,66.497
  Bottom Layer w0.508: JP1.1@66.675,13.691 69.164,13.691 v1(69.723,13.132) ; v1(78.638,21.615) 78.614,21.615 78.334,21.895 C13.1@76.315,21.895 C48.1@76.315,23.266 80.239,27.19 80.239,28.702 v1(83.109,31.572) ; v1(84.531,29.464) 84.531,31.039 84.787,31.295 84.787,38.508 v1(88.519,42.24)
+5: AMS1.3 C17.1 C44.1 C45.1 C52.1 C53.1 controller.20 L2.2 R30.2 U8.1 U8.3 | length 82.9
  Top Layer w0.381: AMS1.3@81.25,18.299 88.137,18.299 C45.1@88.578,18.74 ; v1(87.859,54) 89.332,52.527 89.332,49.428 91.211,47.549 93.675,47.549 94.361,46.863 94.361,20.269 controller.20@92.431,18.339 90.741,18.339 C44.1@90.34,18.74 ; C45.1@88.824,18.986 C44.1@90.094,18.986 89.484,18.986
  Top Layer w0.508: R30.2@72.622,45.082 73.279,44.425 L2.2@76.305,44.425 78.511,44.425 79.197,45.11 79.197,51.714 80.188,52.705 C52.1@81.152,52.705 ; U8.3@80.955,48.997 80.955,50.029 ; U8.1@82.855,48.997 82.855,49.898 82.562,50.19 81.117,50.19 80.955,50.029 ; v1(84.811,54.026) 81.585,54.026 81.152,53.593 C52.1@81.152,52.705 ; 80.955,50.029 80.955,51.06 C53.1@81.152,51.257 C52.1@81.152,52.705
  Bottom Layer w0.508: v1(84.811,54.026) 87.681,54.026 87.706,54 v1(87.859,54)
  other v1: 73.101,42.24 73.533,42.24 73.965,42.24 74.397,42.24 74.828,42.24 75.26,42.24 73.101,42.672 73.533,42.672 73.965,42.672 74.397,42.672 74.828,42.672 75.26,42.672 73.101,43.104 73.533,43.104 73.965,43.104 74.397,43.104 74.828,43.104 75.26,43.104 73.101,43.536 73.533,43.536 73.965,43.536 74.397,43.536 74.828,43.536 75.26,43.536 75.26,43.967 75.692,43.967 76.124,43.967 76.556,43.967 76.987,43.967 77.419,43.967 75.26,44.399 75.692,44.399 76.124,44.399 76.556,44.399 76.987,44.399 77.419,44.399 75.26,44.831 75.692,44.831 76.124,44.831 76.556,44.831 76.987,44.831 77.419,44.831 75.26,45.263 75.692,45.263 76.124,45.263 76.556,45.263 76.987,45.263 77.419,45.263
+12: C1.1 C6.1 C18.1 C21.1 C24.1 C25.1 C37.1 C38.1 D2.1 D5.1 D8.2 D9.2 D14.2 H1.1 R29.2 R46.2 RL1.5 U1.1 U3.1 U6.7 | length 281.9
  Top Layer w0.508: D9.2@11.455,6.255 13.529,6.255 C6.1@14.329,7.055 ; v1(54.534,20.041) 54.534,14.122 v1(52.324,11.913) 52.476,11.913 53.01,11.379 54.28,11.379 54.432,11.532 68.402,11.532 v1(69.494,10.439) ; v1(56.591,27.584) 62.789,27.584 64.11,28.905 D5.1@64.11,30.099 ; C21.1@61.048,37.871 61.048,33.313 61.773,32.588 U3.1@64.349,32.588 63.824,32.062 D5.1@63.824,30.201 ; C1.1@61.201,73.076 61.201,69.101 62.535,67.767 64.154,67.767 U1.1@64.349,67.767 64.154,67.572 D2.1@64.154,65.303 ; D5.1@63.1,30.08 64.033,30.08 D5.1@64.154,30.201 ; v1(67.996,65.354) 68.91,65.354 71.78,62.484 v1@71.78,56.236 ; R29.2@68.151,53.898 70.458,53.898 v1@71.603,55.042 ; C25.1@71.027,56.199 72.692,54.534 80.95,54.534 81.387,54.971 C38.1@81.387,55.934 ; v1(78.816,7.595) 82.575,7.595 85.166,5.004 85.166,4.978 86.081,4.064 89.891,4.064 91.465,5.639 93.345,5.639 94.082,6.375 94.082,13.03 93.523,13.589 H1.1@92.151,13.589 91.999,13.742 D8.2@89.56,13.742 ; C18.1@81.362,59.846 C24.1@81.362,57.839 C38.1@81.362,55.909 C38.1@81.387,55.934 ; C38.1@81.387,56.518 C38.1@81.387,55.934 ; v1@84.912,56.515 84.861,56.464 81.917,56.464 C38.1@81.387,55.934 ; v1(89.281,80.137) 89.306,80.162 R46.2@89.306,80.174
  Top Layer w2.032: RL1.5@9.779,2.224 11.455,3.9 D9.2@11.455,6.255
  Bottom Layer w0.508: RL1.5@9.779,2.224 14.492,2.224 21.742,9.474 39.599,9.474 42.951,6.121 42.951,2.87 44.298,1.524 51.257,1.524 51.918,2.184 51.918,11.506 v1(52.324,11.913) ; v1(54.534,20.041) 54.534,25.476 56.591,27.534 v1(56.591,27.584) ; v1@64.11,30.099 64.186,30.175 64.402,30.391 64.618,30.607 65.329,31.318 65.329,64.135 v1@64.864,64.6 ; v1@64.154,65.303 v1@64.157,65.307 ; v1@64.864,64.601 64.834,64.63 64.402,65.062 v1@64.157,65.307 ; v1(67.996,65.354) 64.205,65.354 v1@64.157,65.307 ; v1(69.494,10.439) 69.494,9.779 71.679,7.595 v1(78.816,7.595) ; U6.7@71.603,55.042 71.606,55.039 U6.7@71.606,54.861 ; 83.464,67.107 87.274,67.107 89.281,69.113 v1(89.281,80.137)
  Bottom Layer w2.032: D14.2@81.502,67.107 83.464,67.107 84.074,66.497 84.963,65.608 84.963,56.788 C37.1@84.843,56.667
  other v1: 63.144,29.489 63.576,29.489 64.008,29.489 64.44,29.489 64.872,29.489 65.303,29.489 63.144,29.921 63.576,29.921 64.008,29.921 64.44,29.921 64.872,29.921 65.303,29.921 63.144,30.353 63.576,30.353 64.008,30.353 64.44,30.353 64.872,30.353 65.303,30.353 63.144,30.785 63.144,30.785 63.576,30.785 63.576,30.785 64.008,30.785 64.008,30.785 64.008,30.785 64.44,30.785 64.44,30.785 64.44,30.785 64.872,30.785 64.872,30.785 65.303,30.785 65.303,30.785 71.425,54.178 71.857,54.178 71.425,54.61 71.857,54.61 71.425,55.042 71.857,55.042 71.425,55.474 71.857,55.474 71.425,55.905 71.857,55.905 83.185,56.032 83.617,56.032 84.049,56.032 84.48,56.032 84.912,56.032 85.344,56.032 71.425,56.337 71.857,56.337 83.185,56.464 83.617,56.464 84.049,56.464 84.48,56.464 84.912,56.464 85.344,56.464 83.185,56.896 83.617,56.896 84.049,56.896 84.48,56.896 84.912,56.896 85.344,56.896 83.185,57.328 83.185,57.328 83.617,57.328 83.617,57.328 84.049,57.328 84.049,57.328 84.049,57.328 84.48,57.328 84.48,57.328 84.48,57.328 84.912,57.328 84.912,57.328 85.344,57.328 85.344,57.328 63.119,64.643 63.551,64.643 63.983,64.643 64.414,64.643 64.846,64.643 65.278,64.643 63.119,65.075 63.551,65.075 63.983,65.075 64.414,65.075 64.846,65.075 65.278,65.075 63.119,65.507 63.551,65.507 63.983,65.507 64.414,65.507 64.846,65.507 65.278,65.507 63.119,65.938 63.119,65.938 63.551,65.938 63.551,65.938 63.983,65.938 63.983,65.938 63.983,65.938 64.414,65.938 64.414,65.938 64.414,65.938 64.846,65.938 64.846,65.938 65.278,65.938 65.278,65.938
A0: controller.5 U4.18 | length 31.1
  Top Layer w0.203: v1(73.162,36.314) 73.18,36.297 73.228,36.297 73.228,35.458 74.017,34.67 74.017,34.651 74.625,34.043 U4.18@74.625,33.907
  Bottom Layer w0.203: v1(73.162,36.314) 89.764,52.916 89.764,53.721 controller.5@92.456,56.413
AGND: C4.2 C5.1 C7.1 C9.2 C10.2 C12.2 C29.1 C30.1 C43.1 C50.2 C51.2 C54.2 C55.2 C56.2 C60.1 CF2.1 IC1.4 NT4.2 NTC1.1 NTC2.2 R35.2 R42.2 U4.8 U5.1 U5.2 U8.2 | length 187.9
  Top Layer w0.203: U5.2@31.753,28.131 U5.1@31.753,27.481 C10.2@33.473,27.481 ; C10.2@33.536,27.481 34.969,27.481 C9.2@35.044,27.407 ; v1(78.613,31.191) 79.248,31.826 79.248,33.598 U4.8@79.911,34.261 82.652,37.002 C50.2@82.652,42.926 ; C29.1@80.131,38.551 80.772,39.192 81.179,39.192 v1(81.255,39.268) ; U8.2@81.905,48.997 81.915,48.986 81.915,48.006 82.22,47.701 83.545,47.701 NT4.2@83.73,47.887 83.73,45.402 C51.2@82.652,44.323
  Top Layer w0.508: NTC1.1@67.652,22.804 67.646,22.798 67.646,19.869 v1(67.64,19.863) 67.64,16.053 69.076,14.617 v1(69.647,14.617) C4.2@71.044,14.617 75.756,14.617 76.733,13.64 IC1.4@76.733,10.51 76.733,9.183 R42.2@77.14,8.776 ; R35.2@77.347,18.352 78.371,18.352 C7.1@78.461,18.263 ; C50.2@82.652,42.926 C51.2@82.652,44.323
  Bottom Layer w0.203: NTC2.2@41.885,49.872 44.26,49.872 46.888,47.244 46.888,32.715 51.46,28.143 60.02,28.143 65.359,22.804 NTC1.1@67.652,22.804
  Bottom Layer w0.508: v1(33.473,27.425) 33.466,27.432 38.252,27.432 48.692,16.993 58.318,16.993 61.163,19.837 67.615,19.837 v1(67.64,19.863) 68.936,19.863 75.921,26.848 78.511,26.848 79.299,27.635 v1(79.299,30.505) v1(78.613,31.191) 79.959,32.537 79.959,32.791 C30.1@79.197,33.553 ; v1(69.647,14.617) 69.647,16.078 71.45,17.882 76.911,17.882 v1(77.347,18.317) ; C43.1@72.657,10.236 75.362,10.236 v1(76.987,8.611) ; C60.1@73.561,33.042 74.911,34.392 76.346,34.392 C5.1@77.238,33.5 77.953,34.214 78.486,34.214 C30.1@79.146,33.553 ; C30.1@79.282,33.689 C30.1@79.146,33.553 ; C56.2@80.439,34.572 79.42,33.553 C30.1@79.146,33.553 ; C56.2@80.448,34.57 C55.2@81.364,35.486 ; v1(81.255,39.268) 82.88,37.643 82.88,37.065 C54.2@82.166,36.35 ; C55.2@81.379,35.487 C54.2@82.293,36.401 C54.2@82.318,36.427
  other v1: 77.355,9.798 77.318,10.973 70.104,10.998 71.018,11.405 76.327,11.532 76.556,13.157 70.637,13.741 73.177,13.792 77.546,13.792 73.914,14.402 79.031,16.999 70.561,17.094 78.08,17.323 59.969,17.374 51.8,17.639 53.442,17.653 50.038,17.678 76.937,17.729 66.904,17.882 68.498,17.878 62.916,17.932 65.811,17.958 71.73,18.034 58.699,18.186 78.715,18.275 77.911,18.441 44.755,19.355 59.817,19.685 50.648,19.71 66.294,19.812 68.605,19.837 62.306,19.964 51.943,20.066 72.796,20.396 73.838,20.676 43.053,20.726 77.495,20.828 78.842,20.853 49.342,21.215 70.231,21.234 41.834,21.793 53.416,21.819 57.02,22.185 55.726,22.272 70.434,22.276 47.089,22.511 58.776,22.758 65.507,22.758 49.045,22.827 62.865,22.962 60.845,23.062 40.386,23.52 51.486,23.622 65.557,23.8 62.684,23.825 58.055,23.954 56.286,24.206 38.964,24.282 60.503,24.46 61.764,24.571 70.485,24.638 63.678,24.714 45.415,24.79 48.768,25.095 71.374,25.476 37.6,25.621 32.741,25.857 35.814,25.857 20.313,25.882 25.654,25.883 29.642,25.959 27.889,26.314 20.828,26.34 43.79,26.34 53.004,26.427 51.079,27.069 65.043,27.138 46.584,27.229 53.351,27.225 44.856,27.305 77.927,27.483 55.22,27.508 64.516,27.737 66.675,27.788 27.94,27.94 41.935,28.016 65.811,28.016 49.911,28.27 48.666,28.397 23.419,28.524 49.403,29.413 39.903,29.489 44.399,29.515 41.478,29.54 45.872,29.54 42.901,29.566 47.585,29.554 36.068,29.896 33.553,30.124 25.614,30.191 50.444,30.988 34.341,31.14 44.323,31.191 30.531,31.293 41.25,31.293 80.061,31.344 37.6,31.471 28.194,31.674 46.457,31.826 49.251,32.207 79.705,32.233 43.032,32.254 32.309,32.436 81.305,35.865 82.118,36.652
AVCC: C4.1 C9.1 C10.1 C12.1 C50.1 C51.1 C54.1 C55.1 C56.1 IC1.8 R4.1 R34.1 U4.9 U5.3 U8.5 | length 99.6
  Top Layer w0.203: U5.3@31.753,28.781 34.918,28.781 C9.1@35.044,28.907 ; v1(78.486,29.591) 78.486,30.302 77.953,30.836 77.953,31.471 78.74,32.258 78.74,33.797 U4.9@79.557,34.615 80.609,35.666 v1(80.609,36.92) 81.89,38.2 81.89,41.681 81.152,42.419 C50.1@81.152,42.926
  Top Layer w0.508: R4.1@69.291,22.923 69.426,22.788 69.426,22.471 v1(69.444,22.454) ; R4.1@69.469,22.454 69.461,22.446 69.461,16.303 C12.1@69.647,16.117 C4.1@71.044,16.117 72.88,16.117 IC1.8@72.923,16.16 ; C50.1@81.152,42.926 C51.1@81.152,44.323 81.152,44.783 U8.5@82.855,46.487
  Bottom Layer w0.203: R34.1@71.425,32.5 71.425,33.249 73.508,35.331 79.076,35.331 C56.1@79.378,35.633
  Bottom Layer w0.508: v1(33.536,28.907) 38.556,28.907 49.073,18.39 57.099,18.39 59.639,20.93 67.92,20.93 v1(69.444,22.454) 70.748,23.758 72.136,25.146 72.72,25.146 75.438,27.864 76.759,27.864 v1(78.486,29.591) ; C56.1@79.388,35.631 79.415,35.631 C55.1@80.656,36.872 ; v1@80.666,36.895 C54.1@81.258,37.487
Blue: BLUE.1 D15.1 JP5.2 KF2.1 NT1.1 R6.2 R?.2 | length 70.4
  Top Layer w0.203: NT1.1@23.186,21.004 24.89,21.004 24.942,21.057
  Top Layer w2.032: R6.2@24.942,18.974 24.942,21.057 ; R?.2@24.942,23.038 24.942,21.057 ; JP5.2@68.275,2.337 68.275,6.172 66.777,7.671 56.083,7.671 51.918,3.505 KF2.1@37.338,3.505 37.338,16.713 32.995,21.057 24.942,21.057
  other v1: 24.232,17.958 24.663,17.958 25.095,17.958 25.527,17.958 25.527,17.958 24.232,18.39 24.663,18.39 25.095,18.39 25.527,18.39 25.527,18.39 24.232,18.821 24.663,18.821 25.095,18.821 25.527,18.821 25.527,18.821 25.527,18.821 24.232,19.253 24.663,19.253 25.095,19.253 25.527,19.253 25.527,19.253 25.527,19.253 24.232,19.685 24.663,19.685 25.095,19.685 25.527,19.685 25.527,19.685 24.232,20.117 24.663,20.117 25.095,20.117 25.527,20.117 25.527,20.117 24.282,21.971 24.714,21.971 25.146,21.971 25.578,21.971 25.578,21.971 24.282,22.403 24.714,22.403 25.146,22.403 25.578,22.403 25.578,22.403 24.282,22.835 24.714,22.835 25.146,22.835 25.578,22.835 25.578,22.835 25.578,22.835 24.282,23.266 24.714,23.266 25.146,23.266 25.578,23.266 25.578,23.266 25.578,23.266 24.282,23.698 24.714,23.698 25.146,23.698 25.578,23.698 25.578,23.698 24.282,24.13 24.714,24.13 25.146,24.13 25.578,24.13 25.578,24.13
BT1: controller.10 U4.46 | length 24.4
  Top Layer w0.203: U4.46@81.679,28.975 82.485,28.169 87.147,28.169 88.9,29.921 88.9,40.945 91.694,43.739 controller.10@92.888,43.739
BT2: controller.11 U4.45 | length 22.9
  Top Layer w0.203: U4.45@81.325,28.621 82.133,27.813 87.452,27.813 89.256,29.616 89.256,39.014 91.44,41.199 controller.11@92.888,41.199
BT3: controller.12 U4.43 | length 22.2
  Top Layer w0.203: U4.43@80.618,27.914 81.224,27.309 81.267,27.309 82.058,26.518 86.843,26.518 89.662,29.337 89.662,36.652 91.669,38.659 controller.12@92.888,38.659
BT4: controller.13 U4.42 | length 20.2
  Top Layer w0.203: U4.42@80.265,27.561 80.872,26.953 81.12,26.953 81.911,26.162 87.173,26.162 90.119,29.108 90.119,33.985 92.253,36.119 controller.13@92.888,36.119
buzzer: controller.8 U4.3 | length 27.3
  Top Layer w0.203: U4.3@81.679,32.493 82.358,33.172 83.693,33.172 85.192,31.674 v1(86.385,31.674)
  Bottom Layer w0.203: v1(86.385,31.674) 88.011,31.674 89.941,33.604 89.941,47.447 91.313,48.819 controller.8@92.888,48.819
CLK: JP1.3 U4.37 | length 25.5
  Top Layer w0.203: v1(73.584,23.317) 74.943,23.317 77.418,25.793 U4.37@78.497,25.793
  Top Layer w0.508: JP1.3@61.595,13.691 61.671,13.767 61.671,18.567 v1(61.646,18.593)
  Bottom Layer w0.203: v1(61.646,18.593) 61.722,18.517 69.852,18.517 73.584,22.248 v1(73.584,23.317)
CS: controller.3 U4.21 | length 38.3
  Top Layer w0.203: v1(72.238,37.287) 71.349,36.398 71.349,35.056 71.957,34.447 71.964,34.447 U4.21@73.564,32.847
  Bottom Layer w0.203: v1(72.238,37.287) 88.417,53.467 88.417,57.455 controller.3@92.456,61.493
current_sense: CF2.2 RF2.2 U4.11 | length 50.1
  Top Layer w0.203: v1(77.549,30.127) 77.394,30.283 77.394,33.865 U4.11@78.85,35.322
  Top Layer w0.254: RF2.2@36.551,28.881 46.684,28.881 50.013,25.552 v1(70.485,25.552)
  Bottom Layer w0.203: v1(70.485,25.552) 70.993,26.06 72.156,26.06 76.206,30.11 77.532,30.11 v1(77.549,30.127)
Earth: JP5.4
en_buck: R29.1 R37.2 U6.2 | length 5.6
  Top Layer w0.508: R29.1@68.151,52.398 R37.2@68.151,50.977 69.75,50.977 70.167,50.559 v1(71.488,50.559)
  Bottom Layer w0.508: v1(71.488,50.559) 71.606,50.441 U6.2@71.606,49.911
enc_a: controller.16 U4.38 | length 16.3
  Top Layer w0.203: U4.38@78.85,26.146 80.384,24.613 87.732,24.613 91.559,28.44 92.829,28.44 controller.16@92.888,28.499
enc_b: controller.15 U4.39 | length 18.1
  Top Layer w0.203: U4.39@79.204,26.5 80.736,24.968 87.503,24.968 91.034,28.499 91.034,30.658 91.415,31.039 controller.15@92.888,31.039
enc_c: controller.14 U4.40 | length 19.3
  Top Layer w0.203: U4.40@79.557,26.853 80.548,25.863 80.904,25.506 81.036,25.375 87.198,25.375 90.5,28.677 90.5,32.055 92.024,33.579 controller.14@92.888,33.579
fan: R3.1 U4.4 | length 34
  Top Layer w0.203: U4.4@81.325,32.847 81.437,32.847 82.398,33.807 83.668,33.807 84.506,32.969 85.979,32.969 87.351,31.598 v1(87.351,29.566) ; v1(86.157,16.256) 86.817,15.596 86.817,7.214 87.147,6.883 88.126,6.883 R3.1@88.138,6.895
  Bottom Layer w0.203: v1(86.157,16.256) 86.157,24.638 87.351,25.832 v1(87.351,29.566)